# Altium PCB BEESC_v1_L8.PcbDoc (part 3 of 4)
Units mil, origin at the board's own origin, x right, y up, seen from the top; angles counter-clockwise.
Board outline 1968.5 x 1751.97 mil, 8 copper layers (Top Layer, GND, SIG1, PWR, GND2, SIG2, GND3, Bottom Layer), stack 62.976 mil thick; 122 components, 109 nets, 495 pads, 353 vias.
Unrouted connection lines stored in the file: 71.
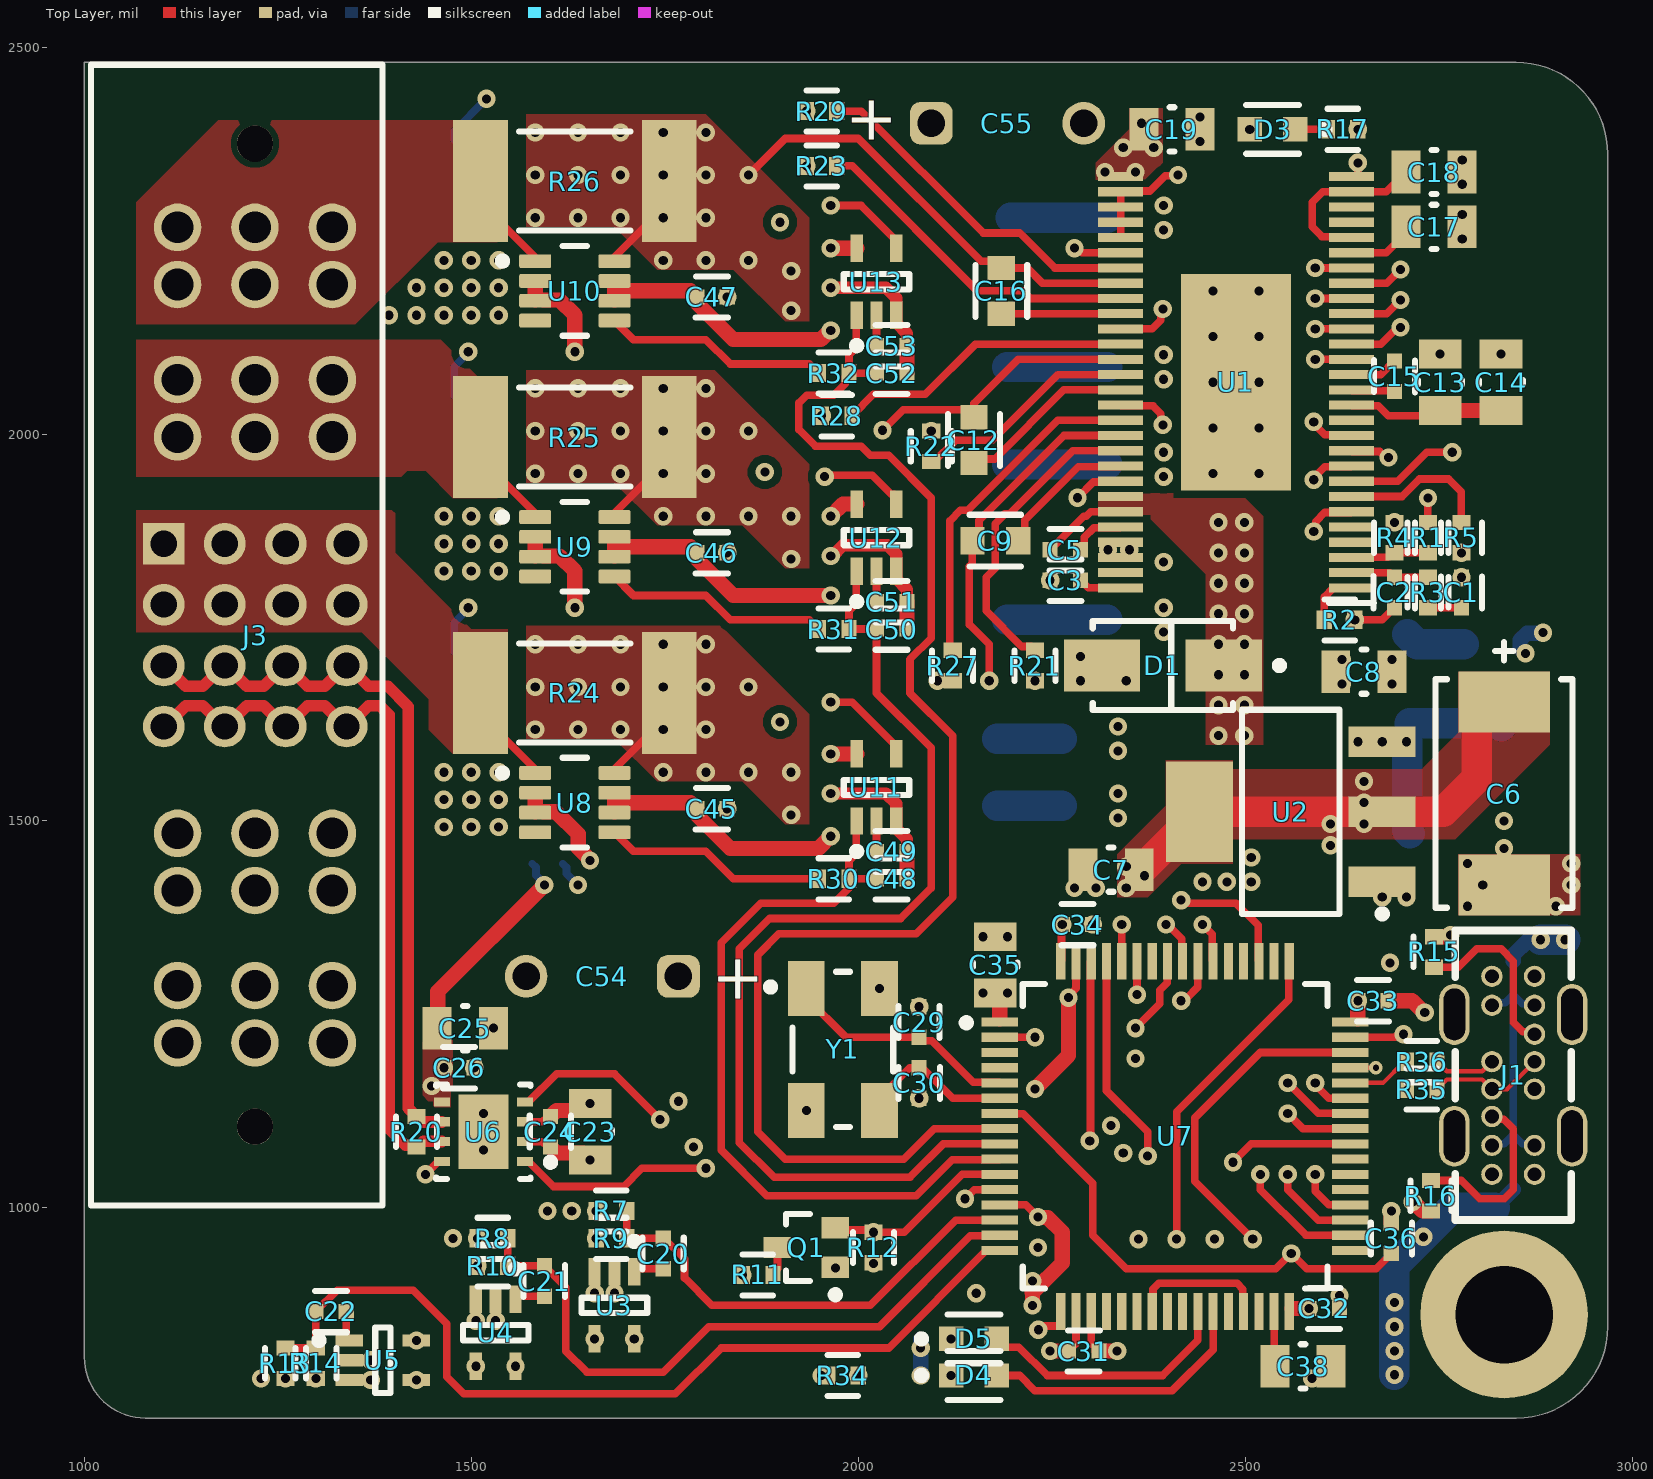
[diagram p0: Top Layer view]

## Part data (continued)
C48 C50 C52: library part 0402B102K500NT, "1nF 50V X7R ±10% 0402 Multilayer Ceramic Capacitors MLCC - SMD/SMT ROHS", Case Code (Imperial)=0402, Case Code (Metric)=1005, Dielectric=X7R, Dielectric Material=Ceramic, Manufacturer="Yageo Group", Manufacturer Part Number=CC0402KRX7R9BB682, Max Operating Temperature=125°C, Min Operating Temperature=-55°C, Supplier Part Number=311-1726-1-ND, Temperature Coefficient=30ppm/°C, Tolerance=10%, Voltage=50V, Case/Package=0402, Category="Ceramic Capacitors", China RoHS=Compliant, ComponentLink1Description=https://datasheet.octopart.com:443/CC0402KRX7R9BB682-Yageo-datasheet-177165144.pdf?src-supplier=IHS, ComponentLink1URL=https://datasheet.octopart.com:443/CC0402KRX7R9BB682-Yageo-datasheet-177165144.pdf?src-supplier=IHS, ComponentLink2Description=https://datasheet.octopart.com:443/CC0402KRX7R9BB682-Yageo-datasheet-78855684.pdf?src-supplier=Upverter, ComponentLink2URL=https://datasheet.octopart.com:443/CC0402KRX7R9BB682-Yageo-datasheet-78855684.pdf?src-supplier=Upverter, ComponentLink3Description=https://datasheet.octopart.com:443/CC0402KRX7R9BB682-Yageo-datasheet-147453679.pdf?src-supplier=Farnell, ComponentLink3URL=https://datasheet.octopart.com:443/CC0402KRX7R9BB682-Yageo-datasheet-147453679.pdf?src-supplier=Farnell, ComponentLink4Description=https://datasheet.octopart.com:443/CC0402KRX7R9BB682-Yageo-datasheet-182029474.pdf?src-supplier=Farnell, ComponentLink4URL=https://datasheet.octopart.com:443/CC0402KRX7R9BB682-Yageo-datasheet-182029474.pdf?src-supplier=Farnell, ComponentLink5Description=https://datasheet.octopart.com:443/CC0402KRX7R9BB682-Yageo-datasheet-140260305.pdf?src-supplier=element14+APAC, ComponentLink5URL=https://datasheet.octopart.com:443/CC0402KRX7R9BB682-Yageo-datasheet-140260305.pdf?src-supplier=element14+APAC, ComponentLink6Description=https://datasheet.octopart.com/CC0402KRX7R9BB682-Yageo-datasheet-10883670.pdf, ComponentLink6URL=https://datasheet.octopart.com/CC0402KRX7R9BB682-Yageo-datasheet-10883670.pdf, ComponentLink7Description=https://datasheet.octopart.com:443/CC0402KRX7R9BB682-Yageo-datasheet-166511530.pdf?src-supplier=Future+Electronics, ComponentLink7URL=https://datasheet.octopart.com:443/CC0402KRX7R9BB682-Yageo-datasheet-166511530.pdf?src-supplier=Future+Electronics, ComponentLink8Description=https://datasheet.octopart.com:443/CC0402KRX7R9BB682-Yageo-datasheet-137700082.pdf?src-supplier=Future+Electronics, ComponentLink8URL=https://datasheet.octopart.com:443/CC0402KRX7R9BB682-Yageo-datasheet-137700082.pdf?src-supplier=Future+Electronics, ComponentLink9Description=https://datasheet.octopart.com:443/CC0402KRX7R9BB682-Yageo-datasheet-137700084.pdf?src-supplier=Future+Electronics, ComponentLink9URL=https://datasheet.octopart.com:443/CC0402KRX7R9BB682-Yageo-datasheet-137700084.pdf?src-supplier=Future+Electronics, ComponentLink10Description=https://datasheet.octopart.com:443/CC0402KRX7R9BB682-Yageo-datasheet-27626582.pdf?src-supplier=Future+Electronics, ComponentLink10URL=https://datasheet.octopart.com:443/CC0402KRX7R9BB682-Yageo-datasheet-27626582.pdf?src-supplier=Future+Electronics, ComponentLink11Description=https://datasheet.octopart.com:443/CC0402KRX7R9BB682-Yageo-datasheet-24578986.pdf?src-supplier=Future+Electronics, ComponentLink11URL=https://datasheet.octopart.com:443/CC0402KRX7R9BB682-Yageo-datasheet-24578986.pdf?src-supplier=Future+Electronics, ComponentLink12Description=https://datasheet.octopart.com:443/CC0402KRX7R9BB682-Yageo-datasheet-15895757.pdf?src-supplier=Future+Electronics, ComponentLink12URL=https://datasheet.octopart.com:443/CC0402KRX7R9BB682-Yageo-datasheet-15895757.pdf?src-supplier=Future+Electronics, ComponentLink13Description=https://datasheet.octopart.com:443/CC0402KRX7R9BB682-Yageo-datasheet-12526321.pdf?src-supplier=Future+Electronics, ComponentLink13URL=https://datasheet.octopart.com:443/CC0402KRX7R9BB682-Yageo-datasheet-12526321.pdf?src-supplier=Future+Electronics, ComponentLink14Description=https://datasheet.octopart.com:443/CC0402KRX7R9BB682-Yageo-datasheet-178018872.pdf?src-supplier=Burklin+Elektronik, ComponentLink14URL=https://datasheet.octopart.com:443/CC0402KRX7R9BB682-Yageo-datasheet-178018872.pdf?src-supplier=Burklin+Elektronik, ComponentLink15Description=https://datasheet.octopart.com:443/CC0402KRX7R9BB682-Yageo-Group-datasheet-165992755.pdf?src-supplier=ODG+(Origin+Data+Global), ComponentLink15URL=https://datasheet.octopart.com:443/CC0402KRX7R9BB682-Yageo-Group-datasheet-165992755.pdf?src-supplier=ODG+(Origin+Data+Global), ComponentLink16Description=https://datasheet.octopart.com:443/CC0402KRX7R9BB682-Yageo-datasheet-120101875.pdf?src-supplier=Megastar, ComponentLink16URL=https://datasheet.octopart.com:443/CC0402KRX7R9BB682-Yageo-datasheet-120101875.pdf?src-supplier=Megastar, ComponentLink17Description=https://datasheet.octopart.com:443/CC0402KRX7R9BB682-Yageo-datasheet-62336348.pdf?src-supplier=Newark, ComponentLink17URL=https://datasheet.octopart.com:443/CC0402KRX7R9BB682-Yageo-datasheet-62336348.pdf?src-supplier=Newark, ComponentLink18Description=http://sigma.octopart.com:80/conflict_mineral_statement/Yageo-company-3.pdf?src-supplier=Compliance+Statements, ComponentLink18URL=http://sigma.octopart.com:80/conflict_mineral_statement/Yageo-company-3.pdf?src-supplier=Compliance+Statements, ComponentLink19Description=http://sigma.octopart.com:80/rohs_statement/Yageo-company-2.pdf?src-supplier=Compliance+Statements, ComponentLink19URL=http://sigma.octopart.com:80/rohs_statement/Yageo-company-2.pdf?src-supplier=Compliance+Statements, Composition=Ceramic, Depth=500µm, Halogen Free="Halogen Free", Height=500µm, Lead Free="Lead Free", Length=1mm, Lifecycle Status=Production, Material=Ceramic, Mounting Technology="Surface Mount", Number of Terminals=2, Packaging="Tape and Reel", Pins=2, Pricing="1=0.1, 10=0.024, 50=0.0156, 100=0.0133, 500=0.00934, 1000=0.00812, 2500=0.00685, 5000=0.00609 (USD)", Radiation Hardening=No, REACH SVHC=Yes, RoHS=Compliant, Schedule B="8532240020, 8532240020|8532240020|8532240020|8532240020|8532240020|8532240020|8532240020|8532240020|8532240020|8532240020|8532240020|8532240020|8532240020|8532240020|8532240020|8532240020|8532240020|8532240020|8532240020|8532240020|8532240020|8532240020|8532240020|85", Stock=93415, Supplier=DigiKey, Termination=SMD/SMT, Thickness=558.8µm, Voltage Rating=50V, Voltage Rating (DC)=50V, Weight=652.039032µg, Width=500µm
C54 C55: library part 860020678024, "Aluminium Electrolytic Capacitors - Radial Leaded WCAP-ATG5 680uF 50V 20% Radial"
D1: "-55℃~+125℃ 3A 40V 500uA@40V 550mV@3A Independent SMA(DO-214AC) Schottky Diodes ROHS", Manufacturer_Name=onsemi, Manufacturer_Part_Number=SS18, Mouser Part Number=512-SS18, Datasheet Link=https://www.onsemi.com/pub/Collateral/SS19-D.PDF, Geometry.Height=2.7mm, Mouser Price/Stock=https://www.mouser.co.uk/ProductDetail/onsemi-Fairchild/SS18?qs=mVVXn4M53U%252B25aMJheuSLA%3D%3D
D2: "-65℃~+150℃ 400W@10/1000us 43.5A 5V 7V 800uA 9.2V TVS Unidirectional DO-214AC(SMA) ESD and Surge Protection (TVS/ESD) ROHS", Manufacturer_Name=onsemi, Manufacturer_Part_Number=SS18, Mouser Part Number=512-SS18, Datasheet Link=https://www.onsemi.com/pub/Collateral/SS19-D.PDF, Geometry.Height=2.7mm, Mouser Price/Stock=https://www.mouser.co.uk/ProductDetail/onsemi-Fairchild/SS18?qs=mVVXn4M53U%252B25aMJheuSLA%3D%3D
D3: "-40℃~+85℃ 120° 2.4V 20mA 300mcd 40mW 615nm~630nm 645nm Red Water Clear 0603 LED Indication - Discrete ROHS"
D4: "100mW 120° 175mcd 3.1V 460nm~475nm 469nm 5mA Blue Water Clear 0603 LED Indication - Discrete ROHS"
D5: "-40℃~+85℃ 120° 20mA 2V~2.2V 30mcd~42mcd 40mW 567nm~573nm Discrete Diode Top-mount Water Clear Yellow Green 0603 LED Indication - Discrete ROHS"
J1: "-40℃~+85℃ 1 10,000 Cycles 14P 20V 5A Black Female Through Hole Type-C USB 3.1 Plugin USB Connectors ROHS"
J2: "Connector Header, GH Series, 5 Position, 1.25mm, Surface Mount, Right Angle, Tin, Natural"
J3: library part CMP-414-000000-2, "5mm (.1969 Inch) / 2mm (.0787 Inch) Pitch Power / Signal, Board to Board / Wire to Board Shrouded Box Header Connectors, Vertical or Right Angle, Locking Clip Option, PowerStrip™/30 Amps", Package=None, Availability=Unavailable, Component Type=Standard, Design Item ID=MPTC-02-16-02-01-XX-X-RA-LC, MF=Samtec, MP=MPTC-02-16-02-01-XX-X-RA-LC, Pin Count=40, Price=None, Source=MPTC-02-16-02-01-XX-X-RA-LC.SchLib, System=Connector
L1: library part NR8040-220M, "2.1A 2.4A 22uH 69mΩ Magnetic Shielded Inductor ±20% SMD,8x8mm Power Inductors ROHS"
Q1: "-55℃~+150℃ 2.4pF@30V 2V@250uA 32pF@30V 340mA 3Ω@4.5V 470mW 500pC@4.5V 60V SOT-323 MOSFETs ROHS"
Q2 Q3 Q4 Q5 Q6 Q7: "Insulated-Gate Field-Effect Transistor (IGFET), N-Channel, Enhancement, Body Diode, Pin 1 Source, 2 Source, 3 Source, 4 Source, 5 Gate, 6 Drain, 6 Pins", Manufacturer="Infineon Technologies", Manufacturer Order Number=IST006N04NM6, PackageReference=PG-HSOF-5-4
R1: library part 0402WGF3301TCE, "-55℃~+155℃ 3.3kΩ 50V 62.5mW Thick Film Resistor ±1% ±100ppm/℃ 0402 Chip Resistor - Surface Mount ROHS"
R2: library part 0402WGF2203TCE, "-55℃~+155℃ 220kΩ 50V 62.5mW Thick Film Resistor ±1% ±100ppm/℃ 0402 Chip Resistor - Surface Mount ROHS"
R3: library part 0402WGF1502TCE, "-55℃~+155℃ 15kΩ 50V 62.5mW Thick Film Resistor ±1% ±100ppm/℃ 0402 Chip Resistor - Surface Mount ROHS"
R4: library part 0402WGJ0183TCE, "-55℃~+155℃ 18kΩ 50V 62.5mW Thick Film Resistor ±100ppm/℃ ±5% 0402 Chip Resistor - Surface Mount ROHS"
R5 R6 R34: library part 0402WGF1002TCE, "-55℃~+155℃ 10kΩ 50V 62.5mW Thick Film Resistor ±1% ±100ppm/℃ 0402 Chip Resistor - Surface Mount ROHS"
R7 R8 R11 R13: library part 0402WGF3902TCE, "-55℃~+155℃ 39kΩ 50V 62.5mW Thick Film Resistor ±1% ±100ppm/℃ 0402 Chip Resistor - Surface Mount ROHS"
R9 R10 R12 R14: library part 0402WGF2201TCE, "-55℃~+155℃ 2.2kΩ 50V 62.5mW Thick Film Resistor ±1% ±100ppm/℃ 0402 Chip Resistor - Surface Mount ROHS"
R15 R16: library part 0402WGF5101TCE, "-55℃~+155℃ 5.1kΩ 50V 62.5mW Thick Film Resistor ±1% ±100ppm/℃ 0402 Chip Resistor - Surface Mount ROHS"
R17: library part 0402WGF4701TCE, "-55℃~+155℃ 4.7kΩ 50V 62.5mW Thick Film Resistor ±1% ±100ppm/℃ 0402 Chip Resistor - Surface Mount ROHS"
R18 R19: library part 0402WGF2200TCE, "-55℃~+155℃ 220Ω 50V 62.5mW Thick Film Resistor ±1% ±100ppm/℃ 0402 Chip Resistor - Surface Mount ROHS"
R20: library part 0402WGF1200TCE, "-55℃~+155℃ 120Ω 50V 62.5mW Thick Film Resistor ±1% ±100ppm/℃ 0402 Chip Resistor - Surface Mount ROHS"
R21 R22 R23 R27 R28 R29: library part 0402WGF470KTCE, "-55℃~+155℃ 4.7Ω 50V 62.5mW Thick Film Resistor ±1% ±200ppm/℃ 0402 Chip Resistor - Surface Mount ROHS"
R24 R25 R26: library part HoCGX2512-3W-1.5mR-1%, "1.5mΩ 3W Current Sense Resistor SMD ±1% ±25ppm/℃ 2512 Current Sense Resistors / Shunt Resistors ROHS"
R30 R31 R32: library part 0402WGF1001TCE, "-55℃~+155℃ 1kΩ 50V 62.5mW Thick Film Resistor ±1% ±100ppm/℃ 0402 Chip Resistor - Surface Mount ROHS"
R33: library part NCP15XH103F03RC, "-40℃~+125℃ 0.5mm 100mW 10kΩ 1mW/℃ 1mm 310uA 3380K 3434K 3455K ±1% ±1% 0402 NTC Thermistors ROHS"
R35 R36: library part 0402WGF220JTCE, "-55℃~+155℃ 22Ω 50V 62.5mW Thick Film Resistor ±1% ±100ppm/℃ 0402 Chip Resistor - Surface Mount ROHS"
U2: library part TC2117-3.3VDBTR, "-40℃~+125℃@(Tj) 1 3.3V 450mV@(800mA) 55dB@(1kHz) 6V 800mA 80uA Fixed Over Current Protection Positive SOT-223 Voltage Regulators - Linear, Low Drop Out (LDO) Regulators ROHS"
U3 U4 U5 U11 U12 U13: library part SN74LVC1G66DCKR, "-40℃~+85℃ 1 1.65V~5.5V 13pF 195MHz 1:1 4.2ns 5.5Ω 5ns 600ps SC-70-5 Analog Switches, Multiplexers ROHS"
U6: "-40℃~+150℃ 4.5V~5.5V 5Mbps 70mA CAN Transceiver HVSON-8-EP(3x3) CAN Transceivers ROHS"
U7: "-40℃~+85℃ 1.8V~3.6V 12bit 12bit 168MHz 192KB 1MB 32 Bit 51 ARM Cortex-M4 Built-in FLASH LQFP-64(10x10) Microcontrollers (MCU/MPU/SOC) ROHS"
U8 U9 U10: library part INA296A3IDDFR, "-30V~+30V -40℃~+125℃ -5V~110V 1 1.1MHz 100nV/℃ 166dB 2.5mA 2.7V~20V 20V 35uA 39nV/√Hz@1kHz 3uV 50V/V 8V/us SOT-23 Current Sense Amplifiers ROHS"
Y1: library part ABM3B-8.000MHZ-10-1-U-T, "-10℃~+60℃ 10pF 200Ω 8MHz ±10ppm ±10ppm SMD5032-4P Crystals ROHS"

## Free pads (board coordinates)
  round 216.54 hole 125.98: 2(2834.65,862.2)

## Via types
v1: diameter 23.62, hole 11.81, Top Layer to Bottom Layer, tented both sides, 351 vias
v2: diameter 17.72, hole 7.87, Top Layer to Bottom Layer, tented both sides, 2 vias

## Nets (pads, with @x,y where several pads share a name; then routed paths per layer and width w, separated by ;. In a path a pad name is that pad's centre, name@x,y a point inside that pad or via, vN(x,y) a via of type N, cw(c..) or ccw(c..) an arc to the next point about the centre after c; other vN are vias at no path point)
+3.3: C6.2 C7.1 C25.1 C26.1 C27.1 C28.1 C31.1 C32.1 C33.1 C34.1 C35.1 C45.1 C46.1 C47.1 J2.5 R33.2 U1.49 U2.2 U2.4 U3.5 U4.5 U5.5 U6.5 U7.1 U7.13 U7.19 U7.32 U7.48 U7.64 U8.6 U8.7 U9.6 U9.7 U10.6 U10.7 U11.5 U12.5 U13.5 | length 7688.9
  Top Layer w9.84: C35.1@2177.17,1277.56 C35.1@2183.07,1271.65 ; U7.13@2183.07,1003.94 2216.54,1003.94 v1(2232.28,988.19) ; U7.64@2261.81,1318.9 2262.8,1319.88 2262.8,1365.16 v1(2263.78,1366.14) ; v1(2283.46,1917.65) 2303.81,1937.99 2338.07,1937.99 U1.49@2339.05,1938.98 ; U7.19@2301.18,866.14 2301.18,824.8 C31.1@2311.02,814.96
  Top Layer w19.68: C25.1@1455.71,1232.28 1456.69,1233.27 1456.69,1279.53 v1(1594.49,1417.32) ; U8.6@1685.04,1511.81 1685.04,1523.62 ; U8.7@1685.04,1535.43 1685.04,1523.62 ; U9.6@1685.04,1842.52 1685.04,1854.33 ; U9.7@1685.04,1866.14 1685.04,1854.33 ; U10.6@1685.04,2173.23 1685.04,2185.04 ; U10.7@1685.04,2196.85 1685.04,2185.04 ; v1@1963.81,2133.11 1962.75,2133.11 1951.69,2122.05 1838.58,2122.05 1791.34,2169.29 C47.1@1791.34,2177.17 1783.46,2185.04 1685.04,2185.04 ; v1(1964.57,1480.3) 1948.84,1464.57 1834.65,1464.57 1791.34,1507.87 C45.1@1791.34,1515.75 1783.46,1523.62 1685.04,1523.62 ; v1(1964.57,1586.6) U11.5@1998.04,1586.6 ; v1(1964.57,1791.34) 1838.58,1791.34 1791.34,1838.58 C46.1@1791.34,1846.46 1783.46,1854.33 1685.04,1854.33 ; v1(1964.57,1893.7) 1980.3,1909.43 U12.5@1998.04,1909.43 ; v1(1964.57,2240.16) U13.5@1998.03,2240.16 ; U7.1@2183.07,1244.09 C35.1@2183.07,1271.65 ; 2224.9,890.26 2225.39,890.75 ; v1(2225.39,874.02) 2225.39,890.75 ; v1@2226.15,906.27 v1(2225.39,905.51) 2225.39,890.75 ; v1(2232.28,988.19) 2233.04,987.44 2244.85,987.44 2263.78,968.5 2263.78,929.13 2225.39,890.75 ; C31.1@2311.02,814.96 v1(2334.65,814.96) ; U7.32@2561.02,870.08 v1(2582.68,870.08) ; U7.48@2645.67,1244.09 v1(2645.67,1267.72)
  Top Layer w39.37: C7.1@2366.14,1437.01 U2.4@2440.94,1511.81 U2.2@2677.17,1511.81 2755.91,1511.81 2799.21,1555.12 2799.21,1633.86 2818.9,1653.54 C6.2@2834.65,1653.54
  SIG1 w19.68: v1(1429.13,828.74) v1@1429.13,830.71
  SIG2 w19.68: v1(1429.13,828.74) 1430.2,828.74 1434.14,824.8 1527.56,824.8 v1(1557.09,795.28) ; v1(1710.63,830.71) 1779.53,830.71 ; v1(2161.42,1277.56) v1(2192.91,1277.56) 2193.67,1276.81 2219.26,1276.81 2350.39,1145.67 2409.45,1145.67 2433.07,1169.29 ; v1(2232.28,988.19) 2279.53,988.19 2308.07,959.65 v1(2362.2,959.65) ; v1(2263.78,1366.14) 2263.78,1367.21 2240.16,1390.83 2240.16,1425.2 2271.65,1456.69 2314.96,1456.69 ; v1(2334.65,814.96) 2334.65,816.03 2362.2,843.59 v1(2362.2,959.65) ; v1(2582.68,870.08) 2451.77,870.08 v1(2362.2,959.65) ; 2602.36,1338.58 2645.67,1295.28 v1(2645.67,1267.72)
  SIG2 w39.37: v1(1429.13,828.74) 1385.83,872.05 1385.83,1074.8 1456.69,1145.67 v1@1456.69,1185.04 ; v1(1557.09,795.28) 1568.9,783.46 1732.28,783.46 1779.53,830.71 2011.81,830.71 2118.11,937.01 2177.17,937.01 2208.66,905.51 v1(2225.39,905.51) 2308.07,905.51 v1(2362.2,959.65) 2362.2,984.25 2433.07,1055.12 2433.07,1169.29 2602.36,1338.58 2602.36,1511.81 ; v1(1964.57,1480.3) 2003.95,1480.3 2057.1,1533.45 ; v1(1964.57,1586.6) 2003.95,1586.6 2027.56,1562.99 ; v1(1964.57,1791.34) 2003.95,1791.34 2027.56,1814.95 ; v1(1964.57,1893.7) 2003.95,1893.7 2055.13,1842.52 2130.26,1917.65 ; v1(1964.57,2133.86) 1984.23,2133.86 2037.38,2187.01 ; v1(1964.57,2240.16) 1984.23,2240.16 2035.41,2188.98 2078.74,2188.98 2177.17,2090.55 2177.17,1964.56 2130.26,1917.65 ; 2055.12,1842.51 2027.56,1814.95 ; v1(2283.46,1917.65) 2130.26,1917.65 ; v1(2370.08,1429.13) 2342.52,1456.69 2314.96,1456.69 2238.2,1533.45 2057.1,1533.45 ; 2027.56,1562.99 2057.1,1533.45 ; 2027.56,1562.99 2027.56,1814.95
  Bottom Layer w9.84: R33.2@1578.74,1444.88 1583.66,1439.96 1583.66,1429.98 1594.49,1419.15 v1(1594.49,1417.32)
  other v1: 1448.82,1157.48 1464.57,1181.1 2346.46,1413.39 2346.46,1440.94 2610.24,1468.5 2610.24,1496.06 2653.54,1496.06 2653.54,1523.62 2653.54,1551.18
+5: C8.1 C10.2 C11.1 C23.1 C24.1 D2.1 J1.A4 J1.A9 J1.B4 J1.B9 L1.2 Q1.1 R4.1 U2.3 U6.3 | length 4127.7
  Top Layer w9.84: U6.3@1569.39,1111.22 1591.68,1111.22 1593.64,1113.19 1597.44,1113.19 C24.1@1602.36,1118.11
  Top Layer w19.68: C24.1@1602.36,1118.11 1610.24,1125.98 1644.68,1125.98 v1(1653.54,1134.84)
  SIG1 w39.37: v1(1653.54,1134.84) 1827.76,960.63 1932.09,960.63 ; v1(1970.47,922.24) 1932.09,960.63 ; v1(2692.91,784.3) v1(2692.91,814.96) v1(2692.91,846.46) v1(2692.91,877.95) ; v1(2730.32,962.6) 2692.91,925.2 v1(2692.91,877.95) ; 1932.09,960.63 2038.39,1066.93 2177.17,1066.93 2204.72,1039.37 2259.84,1039.37 2299.21,1000 2299.21,937.01 2409.45,826.77 2641.73,826.77 v1(2692.91,877.95)
  SIG2 w9.84: J1.B4@2818.9,1080.71 2820.87,1082.68 2834.65,1082.68 2846.46,1094.49 ; J1.B9@2818.9,1261.82 2822.29,1265.21 2836.07,1265.21 2846.46,1275.59 ; 2846.46,1023.62 2846.46,1094.49 ; 2846.46,1318.9 2846.46,1275.59 ; J1.A9@2874.02,1080.71 2872.05,1082.68 2858.27,1082.68 2846.46,1094.49 ; J1.A4@2874.02,1261.82 2872.05,1263.78 2858.27,1263.78 2846.46,1275.59 ; 2846.46,1094.49 2846.46,1275.59
  SIG2 w19.68: 2822.83,1000 2846.46,1023.62 ; 2846.46,1318.9 2846.46,1326.77 2865.39,1345.7 2881.14,1345.7 v1(2881.89,1346.46)
  SIG2 w39.37: v1(2645.67,1602.36) v1(2677.17,1602.36) v1(2708.66,1602.36) 2746.44,1564.58 2840.93,1564.58 2877.95,1527.56 2877.95,1433.07 2858.27,1413.39 2858.27,1370.08 v1(2881.89,1346.46) v1(2913.39,1346.46) ; v1(2692.91,784.3) v1(2692.91,814.96) v1(2692.91,846.46) v1(2692.91,877.95) 2692.91,925.2 v1(2730.32,962.6) 2767.72,1000 2822.83,1000
  Bottom Layer w9.84: J1.B4@2818.9,1080.71 2820.87,1082.68 2834.65,1082.68 2846.46,1094.49 ; J1.B9@2818.9,1261.82 2822.29,1265.21 2836.07,1265.21 2846.46,1275.59 ; 2846.46,1023.62 2846.46,1094.49 ; 2846.46,1318.9 2846.46,1275.59 ; J1.A9@2874.02,1080.71 2872.05,1082.68 2858.27,1082.68 2846.46,1094.49 ; J1.A4@2874.02,1261.82 2872.05,1263.78 2858.27,1263.78 2846.46,1275.59 ; 2846.46,1094.49 2846.46,1275.59
  Bottom Layer w19.68: 2822.83,1000 2846.46,1023.62 ; 2846.46,1318.9 2846.46,1326.77 2865.39,1345.7 2881.14,1345.7 v1(2881.89,1346.46)
  Bottom Layer w39.37: v1(2692.91,784.3) v1(2692.91,814.96) v1(2692.91,846.46) v1(2692.91,877.95) 2692.91,925.2 v1(2730.32,962.6) 2767.72,1000 2822.83,1000 ; L1.2@2709.65,1602.36 2709.65,1487.2 C10.2@2712.6,1484.25 ; L1.2@2709.65,1741.14 2722.44,1728.35 C11.1@2782.48,1728.35 ; L1.2@2712.6,1625.98 2826.77,1625.98 D2.1@2830.71,1622.05 ; v1(2881.89,1346.46) v1(2913.39,1346.46)
  other v1: 2689.96,1677.17 2689.96,1708.66 2692.91,1885.83
ADC_15: U7.25
ADC_TEMP: C56.1 R33.1 R34.2 U7.17 | length 1333.5
  Top Layer w9.84: v1(2232.78,842.52) 2236.51,842.52 2241.43,847.44 2260.83,847.44 2261.81,848.42 U7.17@2261.81,866.14
  SIG1 w19.68: v1@1599.18,995.31 1599.18,963.81 1637.8,925.2 1704.72,925.2 1767.72,862.2 1921.26,862.2 v1(2000,783.46)
  SIG2 w9.84: v1(2000,783.46) 2027.56,755.91 2146.17,755.91 v1(2232.78,842.52)
  SIG2 w19.68: v1@1599.18,995.31 v1(1598.43,996.06) 1599.18,996.82 1599.18,1020.44 1614.17,1035.43 1614.17,1179.63 1665.35,1230.81 1665.35,1389.76 v1(1637.8,1417.32)
  Bottom Layer w9.84: R33.1@1618.11,1444.88 1623.03,1439.96 1623.03,1432.09 v1(1637.8,1417.32)
AN_IN: Q1.2 R12.2 U7.11 | length 246
  Top Layer w9.84: Q1.2@1970.47,974.41 1973.43,971.46 2016.73,971.46 v1(2019.68,968.5) 2059.69,968.5 2134.49,1043.31 U7.11@2183.07,1043.31
C_A: R30.1 U8.5 | length 288.7
  Top Layer w9.84: U8.5@1685.04,1485.24 1709.65,1460.63 1803.15,1460.63 1838.6,1425.18 R30.1@1948.82,1425.18
C_B: R31.1 U9.5 | length 291.9
  Top Layer w9.84: U9.5@1685.04,1815.95 1709.65,1791.34 1803.15,1791.34 1834.65,1759.84 1937.01,1759.84 R31.1@1948.82,1748.02
C_C: R32.1 U10.5 | length 291.9
  Top Layer w9.84: U10.5@1685.04,2146.65 1709.65,2122.05 1803.15,2122.05 1834.65,2090.55 1937.01,2090.55 R32.1@1948.82,2078.74
CAN_N: J3.A03 J3.B03 J3.C03 J3.D03 R20.1 U6.6 | length 974.6
  Top Layer w15: J3.A03@1102.76,1700.79 1104.1,1700.79 1130.97,1673.92 1153.28,1673.92 1180.15,1700.79 J3.B03@1181.5,1700.79 1182.84,1700.79 1209.71,1673.92 1232.02,1673.92 1258.89,1700.79 J3.C03@1260.24,1700.79 1261.58,1700.79 1288.45,1673.92 1310.76,1673.92 1337.63,1700.79 J3.D03@1338.98,1700.79 1340.32,1700.79 1367.19,1673.92 1392.36,1673.92 1418.7,1647.58 1418.7,1128.54 R20.1@1429.13,1118.11 1431.1,1118.11 1438.29,1110.93 1461.81,1110.93 U6.6@1462.11,1111.22
CAN_P: J3.A04 J3.B04 J3.C04 J3.D04 R20.2 U6.7 | length 989.8
  Top Layer w15: J3.A04@1102.76,1622.05 1104.1,1622.05 1130.97,1648.92 1153.28,1648.92 1180.15,1622.05 J3.B04@1181.5,1622.05 1182.84,1622.05 1209.71,1648.92 1232.02,1648.92 1258.89,1622.05 J3.C04@1260.24,1622.05 1261.58,1622.05 1288.45,1648.92 1310.76,1648.92 1337.63,1622.05 J3.D04@1338.98,1622.05 1340.32,1622.05 1367.19,1648.92 1382.01,1648.92 1393.7,1637.23 1393.7,1102.36 1414.98,1081.08 1426.79,1081.08 R20.2@1429.13,1078.74 1431.1,1078.74 1438.29,1085.93 1461.81,1085.93 U6.7@1462.11,1085.63